# Altium PCB esp32_wled.PcbDoc
Units mil, origin at the board's own origin, x right, y up, seen from the top; angles counter-clockwise.
Board outline 3543.31 x 1968.5 mil, 2 copper layers (Top Layer, Bottom Layer); 95 components, 71 nets, 277 pads, 0 vias.
Unrouted connection lines stored in the file: 191.
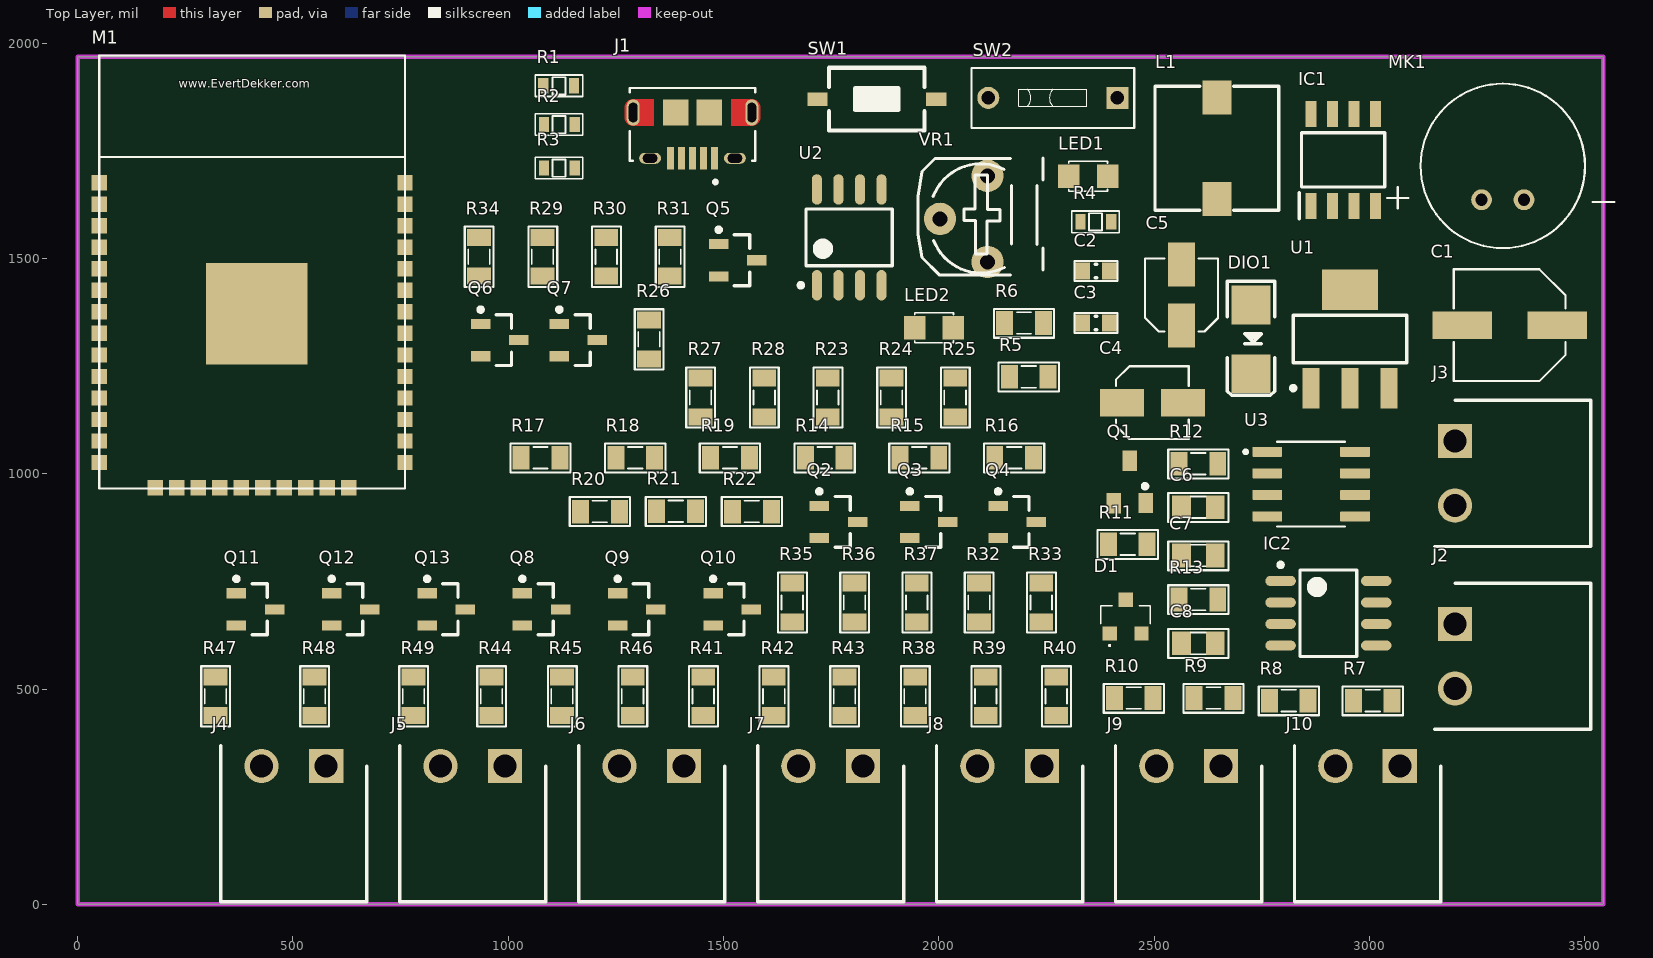
[diagram p0: Top Layer view]
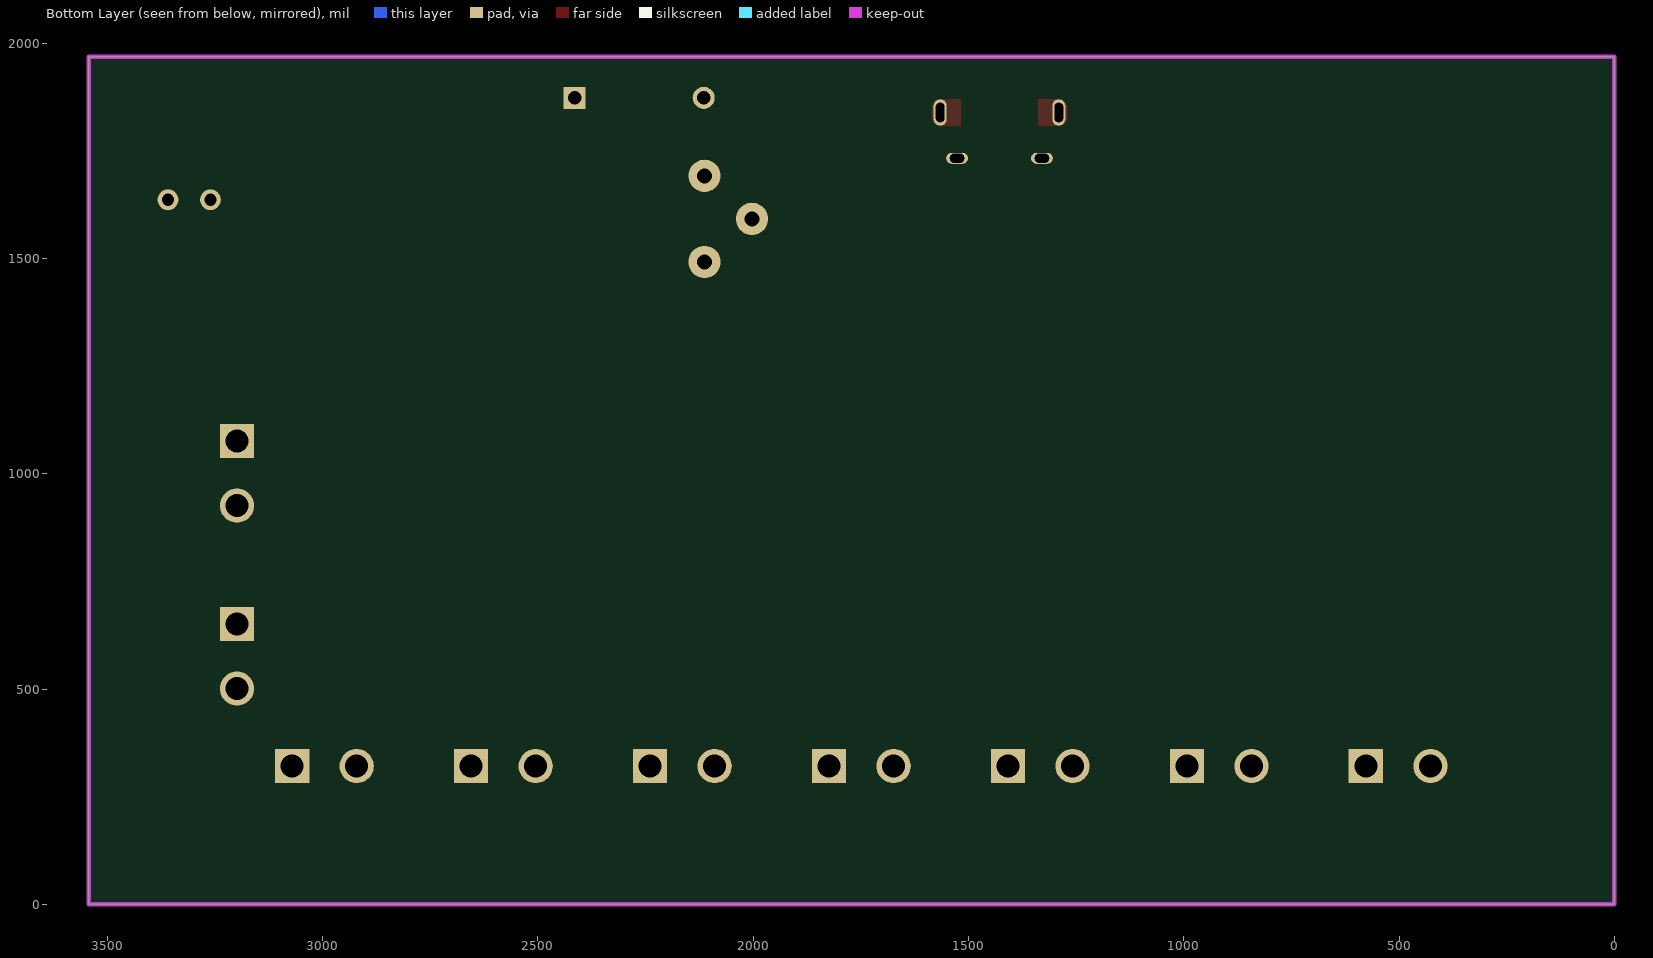
[diagram p1: Bottom Layer view, seen from below]

## Layer stack, top to bottom
Top Solder: solder mask 0.4, Solder Resist, Dk 3.5
Top Layer: signal copper 1.4
Dielectric 1: dielectric 12.6, FR-4, Dk 4.8
Bottom Layer: signal copper 1.4
Bottom Solder: solder mask 0.4, Solder Resist, Dk 3.5

## Board outline
0,0 3543.31,0 3543.31,1968.5 0,1968.5

## Design rules (kind name [scope] priority, off if disabled: settings)
Clearance [All] p1: gap=10
PolygonConnect [All] p1: connectstyle=Relief reliefconductorwidth=10 reliefentries=4 polygonreliefangle="90 Angle" airgapwidth=10
RoomDefinition [5]wled [InComponentClass('[5]wled')] p1: confinementstyle=ConfineIn formatcopy=TRUE lockcomponents=FALSE outline 3970,2890 17700,2890 17700,3390 3970,3390
RoomDefinition [4]Communicate [InComponentClass('[4]Communicate')] p2: confinementstyle=ConfineIn formatcopy=TRUE lockcomponents=FALSE outline 3970,2495 7215,2495 7215,2845 3970,2845
RoomDefinition [3]mic [InComponentClass('[3]mic')] p3: confinementstyle=ConfineIn formatcopy=TRUE lockcomponents=FALSE outline 3970,1795 5765,1795 5765,2445 3970,2445
RoomDefinition [2]Power [InComponentClass('[2]Power')] p4: confinementstyle=ConfineIn formatcopy=TRUE lockcomponents=FALSE outline 3970,1255 6930,1255 6930,1745 3970,1745
RoomDefinition [1]esp32 [InComponentClass('[1]esp32')] p5: confinementstyle=ConfineIn formatcopy=TRUE lockcomponents=FALSE outline 3970,60 6110,60 6110,1205 3970,1205
RoutingVias [All] p1: holewidth=28 width=50 viastyle="Through Hole" minholewidth=28 minwidth=50 maxholewidth=28 maxwidth=50
SolderMaskExpansion [All] p1: expansion=4
Width [All] p1: maxlimit=10 minlimit=10 preferedwidth=10
30 further rules are at their usual default settings.

## Classes and differential pairs
component class [1]esp32: J1 M1 R1 R2 R3 SW1 SW2
component class [2]Power: C1 C2 C3 C4 C5 DIO1 IC1 L1 LED1 R4 U1
component class [3]mic: LED2 MK1 R5 R6 U2 VR1
component class [4]Communicate: C6 C7 C8 D1 IC2 J2 J3 Q1 R7 R8 R9 R10 R11 R12 R13 U3
component class [5]wled: J4 J5 J6 J7 J8 J9 J10 Q2 Q3 Q4 Q5 Q6 Q7 Q8 Q9 Q10 Q11 Q12 Q13 R14 R15 R16 R17 R18 R19 R20 R21 R22 R23 R24 R25 R26 R27 R28 R29 R30 R31 R32 R33 R34 R35 R36 R37 R38 R39 R40 R41 R42 R43 R44 R45 R46 R47 R48 R49

## Components (designator, comment, footprint, x,y, rotation, side; value= is the part's Value field where it differs from the comment)
C1 "470uF" CAP-ALU-SMD-6.3x7.7x2.2 3326,1345 r180 top
C2 "10uF" CN-SMD-0603 2365,1471 r0 top
C3 "10uF" CN-SMD-0603 2365,1350 r0 top
C4 "CN-ALU-SMD" CAP-ALU-SMD-4.5x5x1.4 2496,1165 r0 top
C5 "CN-ALU-SMD" CAP-ALU-SMD-4.5x5x1.4 2564,1415 r90 top
C6 "XXpF" CN-SMD-0805 2603,922 r0 top
C7 "XXpF" CN-SMD-0805 2603,810 r0 top
C8 "XXpF" CN-SMD-0805 2603,606 r0 top
D1 "PSM712-12" PSM71212 2434,668 r0 top
DIO1 "SS34" DIO-SMD-106 2725,1312 r90 top
IC1 "XL1509-5.0E1" SOIC127P600X175-8N#1 2939,1729 r90 top
IC2 "MAX485" SO8 2905,676 r0 top
J1 "10118194-0001LF" AMPHENOL_10118194-0001LF 1428,1839 r180 top
J2 "284513-2" SHDRRA2W80P0X381_1X2_863X920X730P 3199,651 r270 top
J3 "284513-2" SHDRRA2W80P0X381_1X2_863X920X730P 3199,1076 r270 top
J4 "284513-2" SHDRRA2W80P0X381_1X2_863X920X730P 577,321 r180 top
J5 "284513-2" SHDRRA2W80P0X381_1X2_863X920X730P 992.67,321 r180 top
J6 "284513-2" SHDRRA2W80P0X381_1X2_863X920X730P 1408.33,321 r180 top
J7 "284513-2" SHDRRA2W80P0X381_1X2_863X920X730P 1824,321 r180 top
J8 "284513-2" SHDRRA2W80P0X381_1X2_863X920X730P 2239.67,321 r180 top
J9 "284513-2" SHDRRA2W80P0X381_1X2_863X920X730P 2655.33,321 r180 top
J10 "284513-2" SHDRRA2W80P0X381_1X2_863X920X730P 3071,321 r180 top
L1 "1.0 μH" L-SMD-M-7.3x4.5 2646,1756 r0 top
LED1 "LED" LED-0805-Blue 2391.98,1691 r180 top
LED2 "LED" LED-0805-Green 2034,1339 r180 top
M1 "ESP32S_Module" ESP32S 50,966 r0 top
MK1 "AOM-6738P-R" MIC_AOM-6738P-R 3310,1715 r180 top
Q1 "C1815" SOT23B 2444,981 r0 top
Q2 "AO3400" SOT-23_N 1767,888 r0 top
Q3 "AO3400" SOT-23_N 1977,888 r0 top
Q4 "AO3400" SOT-23_N 2182,888 r0 top
Q5 "AO3400" SOT-23_N 1533,1495.79 r0 top
Q6 "AO3400" SOT-23_N 980,1310.37 r0 top
Q7 "AO3400" SOT-23_N 1163,1310.37 r0 top
Q8 "AO3400" SOT-23_N 1077.2,685 r0 top
Q9 "AO3400" SOT-23_N 1298.6,685 r0 top
Q10 "AO3400" SOT-23_N 1520,685 r0 top
Q11 "AO3400" SOT-23_N 413,685 r0 top
Q12 "AO3400" SOT-23_N 634.4,685 r0 top
Q13 "AO3400" SOT-23_N 855.8,685 r0 top
R1 "10K" RES-SMD-0603 1117.99,1901 r180 top
R2 "10K" RES-SMD-0603 1118,1811 r0 top
R3 "0R" RES-SMD-0603 1118,1710 r0 top
R4 "1K" RES-SMD-0603 2364.02,1585 r0 top
R5 "10K" RES-SMD-0805 2209,1225 r0 top
R6 "1K" RES-SMD-0805 2198,1350 r0 top
R7 "10K" RES-SMD-0805 3008,473 r0 top
R8 "10K" RES-SMD-0805 2813,473 r0 top
R9 "120R" RES-SMD-0805 2638,479 r0 top
R10 "10K" RES-SMD-0805 2453,479 r0 top
R11 "10K" RES-SMD-0805 2439,836 r0 top
R12 "60R" RES-SMD-0805 2603,1023 r0 top
R13 "60R" RES-SMD-0805 2603,708 r0 top
R14 "0R" RES-SMD-0805 1735,1037 r0 top
R15 "0R" RES-SMD-0805 1955,1037 r0 top
R16 "0R" RES-SMD-0805 2175,1037 r0 top
R17 "10K" RES-SMD-0805 1075,1037 r0 top
R18 "10K" RES-SMD-0805 1295,1037 r0 top
R19 "10K" RES-SMD-0805 1515,1037 r0 top
R20 "10K" RES-SMD-0805 1213,912 r180 top
R21 "10K" RES-SMD-0805 1389.5,913 r0 top
R22 "10K" RES-SMD-0805 1566,912 r180 top
R23 "0R" RES-SMD-0805 1742.33,1177 r90 top
R24 "0R" RES-SMD-0805 1890.17,1177 r90 top
R25 "0R" RES-SMD-0805 2038,1177 r90 top
R26 "10K" RES-SMD-0805 1327,1312 r90 top
R27 "10K" RES-SMD-0805 1446.67,1177 r90 top
R28 "10K" RES-SMD-0805 1594.5,1177 r90 top
R29 "10K" RES-SMD-0805 1079.83,1504 r90 top
R30 "10K" RES-SMD-0805 1227.67,1504 r90 top
R31 "10K" RES-SMD-0805 1375.5,1504 r90 top
R32 "0R" RES-SMD-0805 2093.39,701 r90 top
R33 "0R" RES-SMD-0805 2238,701 r90 top
R34 "0R" RES-SMD-0805 932,1504 r90 top
R35 "10K" RES-SMD-0805 1659.58,701 r90 top
R36 "10K" RES-SMD-0805 1804.18,701 r90 top
R37 "10K" RES-SMD-0805 1948.79,701 r90 top
R38 "10K" RES-SMD-0805 1945,483 r90 top
R39 "10K" RES-SMD-0805 2109,483 r90 top
R40 "10K" RES-SMD-0805 2273,483 r90 top
R41 "0R" RES-SMD-0805 1453,483 r90 top
R42 "0R" RES-SMD-0805 1617,483 r90 top
R43 "0R" RES-SMD-0805 1781,483 r90 top
R44 "10K" RES-SMD-0805 961,483 r90 top
R45 "10K" RES-SMD-0805 1125,483 r90 top
R46 "10K" RES-SMD-0805 1289,483 r90 top
R47 "10K" RES-SMD-0805 320,483 r90 top
R48 "10K" RES-SMD-0805 550,483 r90 top
R49 "10K" RES-SMD-0805 780,483 r90 top
SW1 "Reset" SW1-SMD 1856,1870 r180 top
SW2 "Flash" SW-DIP1-1 2265,1873 r90 top
U1 "LM1117-3.3V" SOT223 2955,1313 r0 top
U2 "LM393-SPLIT" SO8 1792,1549 r90 top
U3 "TJA1040" SOIC127P600X175-8N#2 2865,976 r0 top
VR1 "10K" VR 2113,1492 r90 top

## Footprints (in the part's own frame and the unit in brackets; to place one, negate y for a bottom-side part, rotate by r counter-clockwise, add the part's x,y. Pads: shape width x height; smd on the part's side, far side on the other; paste and mask are expansions set on the pad)
AMPHENOL_10118194-0001LF [mm]
  rect 0.4x1.35 smd: 1(-1.3,2.7) 2(-0.65,2.7) 3(0,2.7) 4(0.65,2.7) 5(1.3,2.7)
  oval 1.3x0.65 hole 0.55 slot 0.85 at 0 deg: S1(-2.5,2.7) S2(2.5,2.7)
  oval 0.775x1.55 hole 0.5 slot 1.15 at 90 deg: S3(-3.5,0) S6(3.5,0)
  rect 1.5x1.55 smd: S4(-1,0) S5(1,0)
  Top Layer region: 193 vertices and 0 holes, not listed, extent -4,-0.775 -2.3,0.78
  Top Layer region: 193 vertices and 0 holes, not listed, extent 2.3,-0.78 4,0.775
  silkscreen extent -3.7,-1.45 3.7,4.2
CAP-ALU-SMD-4.5x5x1.4 [mm]
  rect 2.6x1.6 smd: 1(-1.8,0) 2(1.8,0)
  silkscreen extent -2.15,-2.15 2.15,2.15, body extent -2.5,-2.15 2.5,2.15, height 5.45
CAP-ALU-SMD-6.3x7.7x2.2 [mm]
  rect 3.5x1.6 smd: 1(-2.8,0) 2(2.8,0)
  silkscreen extent -3.3,-3.3 3.3,3.3, body extent -3.65,-3.3 3.65,3.3, height 7.65
CN-SMD-0603 [mm]
  rect 0.9x1 smd: 1(-0.8,0) 2(0.8,0)
  silkscreen extent -1.27,-0.58 1.27,0.58, body extent -0.8,-0.4 0.8,0.4, height 0.3
CN-SMD-0805 [mil]
  rect 43.31x55 smd: 1(-39.36,0.01) 2(39.37,0.01)
  silkscreen extent -70,-34 70,33, body extent -39,-25 39,25, height 31
DIO-SMD-106 [mil]
  rect 90x90.55 smd: 1(80,0) 2(-80,0)
  silkscreen extent -130,-55 135,55, body extent -99,-50 106,52, height 95
ESP32S [mm] "ESP32S-Module"
  rect 0.9x0.9 smd: 1(0,18.034) 2(0,16.764) 3(0,15.494) 4(0,14.224) 5(0,12.954) 6(0,11.684) 7(0,10.414) 8(0,9.144) 9(0,7.874) 10(0,6.604) 11(0,5.334) 12(0,4.064) 13(0,2.794) 14(0,1.524) 15(3.3,0.034) 16(4.57,0.034) 17(5.84,0.034) 18(7.11,0.034) 19(8.38,0.034) 20(9.65,0.034) 21(10.92,0.034) 22(12.19,0.034) 23(13.46,0.034) 24(14.73,0.034) 25(18.034,1.524) 26(18.034,2.794) 27(18.034,4.064) 28(18.034,5.334) 29(18.034,6.604) 30(18.034,7.874) 31(18.034,9.144) 32(18.034,10.414) 33(18.034,11.684) 34(18.034,12.954) 35(18.034,14.224) 36(18.034,15.494) 37(18.034,16.764) 38(18.034,18.034)
  rect 6x6 smd: 101(9.3,10.3)
  silkscreen extent 0,0 18.03,25.53, body extent 0,0 18.03,25.53, height 2
L-SMD-M-7.3x4.5 [mm] "WE-PDA SMD Shielded Power Inductor, 7345"
  rect 1.7x2 smd: 1(0,3) 2(0,-3)
  silkscreen extent -3.65,-3.65 3.65,3.65, body extent -3.65,-3.65 3.65,3.65, height 4.05
LED-0805-Blue [mil]
  rect 50x55 smd: 1(0,0) 2(90,0)
  silkscreen extent 0,-35 90,35, body extent 5,-25 85,25, height 43
LED-0805-Green [mil]
  rect 50x55 smd: 1(0,0) 2(90,0)
  silkscreen extent 0,-35 90,35, body extent 5,-25 85,25, height 43
MIC_AOM-6738P-R [mm]
  round 1.228 hole 0.72: N(-1.25,2) P(1.25,2)
  silkscreen extent -6.58,-4.85 6.83,4.85, body extent -4.85,-4.85 4.85,4.85, height 7.01
PSM71212 [mm]
  rect 0.84x0.84 smd: 1(-0.94,-1) 2(0.94,-1) 3(0,1)
  silkscreen extent -1.46,-1.75 1.46,0.65, body extent -1.46,-1.34 1.46,1.34, height 1.31
RES-SMD-0603 [mm]
  rect 0.6x0.9 smd: 1(-0.889,0) 2(0.927,0)
  silkscreen extent -1.4,-0.64 1.4,0.64, body extent -0.8,-0.4 0.8,0.4, height 0.43
RES-SMD-0805 [mil]
  rect 39.37x55 smd: 1(-45,0) 2(45,0)
  silkscreen extent -70,-34 70,33, body extent -39,-25 39,25, height 31
SHDRRA2W80P0X381_1X2_863X920X730P [mm]
  rect 2.025x2.025 hole 1.35: 1(0,0)
  round 2.025 hole 1.35: 2(3.81,0)
  silkscreen extent -2.41,-1.2 6.22,8, body extent -3.05,-1.2 6.86,8, height 7.3
SO8 [mm] "SOIC, 8-Leads, Body 4.9x3.9mm, Pitch 1.27mm, IPC High Density"
  oval 1.8x0.6 smd: 1(-2.825,1.905) 2(-2.825,0.635) 3(-2.825,-0.635) 4(-2.825,-1.905) 5(2.825,-1.905) 6(2.825,-0.635) 7(2.825,0.635) 8(2.825,1.905)
  silkscreen extent -2.95,-2.55 1.68,2.98, body extent -2.99,-2.45 3,2.45, height 1.6
SOIC127P600X175-8N#1 [mm]
  rect 1.525x0.65 smd: 1(-2.712,1.905) 2(-2.712,0.635) 3(-2.712,-0.635) 4(-2.712,-1.905) 5(2.712,-1.905) 6(2.712,-0.635) 7(2.712,0.635) 8(2.712,1.905)
  silkscreen extent -3.47,-2.45 1.6,2.58, body extent -3,-2.45 3,2.45, height 1.75
SOIC127P600X175-8N#2 [mm]
  rrect15% 1.75x0.59 smd: 1(-2.585,1.905) 2(-2.585,0.635) 3(-2.585,-0.635) 4(-2.585,-1.905) 5(2.585,-1.905) 6(2.585,-0.635) 7(2.585,0.635) 8(2.585,1.905)
  silkscreen extent -3.97,-2.5 2,2.5
SOT23B [mm] "SOT 23B"
  rect 0.85x1.2 smd: 1(0.94,-1.245) 2(0,1.25) 3(-0.95,-1.25)
  silkscreen extent 0.77,-0.38 1.02,-0.13, body extent -1.5,-1.3 1.5,1.2, height 1.06
SOT223 [mm]
  rect 1x2.4 smd: 1(-2.3,-2.9) 2(0,-2.9) 3(2.3,-2.9)
  rect 3.3x2.4 smd: 4(0,2.9)
  silkscreen extent -3.47,-3.02 3.35,1.4, body extent -3.25,-3.56 3.25,3.4, height 1.68
SOT-23_N [mm] "SOT23, 3-Leads, Body 2.9x1.3mm, Pitch 0.95mm, Lead Span 2.3mm, IPC Medium Density"
  rect 1.15x0.6 smd: 1(-1.125,0.95) 2(-1.125,-0.95) 3(1.125,0)
  silkscreen extent -1.25,-1.5 0.7,1.92, body extent -0.7,-1.5 0.7,1.5, height 1.11
SW1-SMD [mm]
  rect 1.2x0.8 smd: 1(-3.5,0) 2(3.5,0)
  silkscreen extent -2.82,-1.85 2.82,1.85, body extent -3.05,-1.85 3.05,1.85, height 2.5
SW-DIP1-1 [mm] "01p, 2.54mm Pitch, Horizontal, Box Type, THT, flat Actuator, red, without Tape, Tube"
  rect 1.3x1.3 hole 0.8: 1(0,-3.81)
  round 1.3 hole 0.8: 2(0,3.81)
  silkscreen extent -1.77,-4.8 1.77,4.8, body extent -1.77,-4.8 1.77,4.8, height 5.4
VR [mil] "Resistor Variable"
  round 75 hole 35: 1(0,0) 2(100,110) 3(200,0)
  silkscreen extent -30,-129 241,161, body extent -30,-135 230,140, height 177

## Part data
C1: library part CN-ALU-SMD, "Polarized Capacitor (Axial)"
C2 C3: library part CN, "Tu gom"
C4 C5: "Polarized Capacitor (Axial)"
C6 C7 C8: library part CN
D1: "TVS Diode (Bi-directional)"
DIO1: library part "Diode SMD", "Default Diode"
IC1: "Integrated Circuit"
IC2: "RS232 - RS485 (Same sn75176)"
J1: "USB - micro B USB 2.0 Receptacle Connector 5 Position Surface Mount, Right Angle; Through Hole"
J2 J3 J4 J5 J6 J7 J8 J9 J10: "Connector"
L1: library part L-SMD-1
LED1 LED2: library part "LED SMD"
M1: "Esp-32S"
MK1: "MICROPHONE -38DB1.5VDC .5MA 2.2KOHM"
Q1: "NPN 600mW, ECB"
Q2 Q3 Q4 Q5 Q6 Q7 Q8 Q9 Q10 Q11 Q12 Q13: library part IRLML2402, "HEXFET Power MOSFET"
R1 R2 R3 R4 R5 R6 R7 R8 R9 R10 R11 R12 R13 R14 R15 R16 R17 R18 R19 R20 R21 R22 R23 R24 R25 R26 R27 R28 R29 R30 R31 R32 R33 R34 R35 R36 R37 R38 R39 R40 R41 R42 R43 R44 R45 R46 R47 R48 R49: library part Res-SMD, "Resistor"
SW1 SW2: library part SW2, "Switch button 2 pin"
U1: library part LM1117, "800mA Low-Dropout Linear Regulator"
U2: "IC DUAL COMPARATOR"
U3: "1/1 Transceiver Half CANbus 8-SO"
VR1: library part VR, "Var Resistor"

## Nets (pads, with @x,y where several pads share a name; then routed paths per layer and width w, separated by ;. In a path a pad name is that pad's centre, name@x,y a point inside that pad or via, vN(x,y) a via of type N, cw(c..) or ccw(c..) an arc to the next point about the centre after c; other vN are vias at no path point)
3V3: C3.1 C5.1 IC2.8 LED1.1 M1.2 Q2.1 Q3.1 Q4.1 Q5.1 Q6.1 Q7.1 Q8.1 Q9.1 Q10.1 Q11.1 Q12.1 Q13.1 R1.1 R2.2 R5.1 R7.2 R8.2 R20.1 R21.1 R22.1 R29.1 R30.1 R31.1 R38.1 R39.1 R40.1 R47.1 R48.1 R49.1 U1.2 U2.8 VR1.1
5V: C2.1 C4.1 IC1.3 J1.1 L1.1 R17.1 R18.1 R19.1 R26.1 R27.1 R28.1 R35.1 R36.1 R37.1 R44.1 R45.1 R46.1 U1.3 U3.3
12V: C1.1 IC1.1 J4.1 R14.1 R15.1 R16.1 R23.1 R24.1 R25.1 R32.1 R33.1 R34.1 R41.1 R42.1 R43.1
BTN_M1: M1.26
BTN_M2: M1.29
BTN_M3: M1.6
BTN_M4: M1.23
BTN_M5: M1.7
BTN_M6: M1.8
BTN_M7: M1.9
BTN_M8: M1.11
BTN_M9: M1.25 R1.2 SW2.2
CANH: C8.2 J3.2 R13.2 U3.7
CANL: C6.2 J3.1 R12.1 U3.6
DS: M1.31
DS_2: M1.27
ESP_LED_1: Q2.2 R20.2
ESP_LED_2: Q3.2 R21.2
ESP_LED_3: Q4.2 R22.2
ESP_LED_4: Q5.2 R29.2
ESP_LED_5: Q6.2 R30.2
ESP_LED_6: Q7.2 R31.2
ESP_LED_7: Q8.2 R38.2
ESP_LED_8: Q9.2 R39.2
ESP_LED_9: Q10.2 R40.2
ESP_LED_10: Q11.2 R47.2
ESP_LED_11: Q12.2 R48.2
ESP_LED_12: Q13.2 R49.2
GND: C1.2 C2.2 C3.2 C4.2 C5.2 C6.1 C7.1 C8.1 D1.3 DIO1.1 IC1.5 IC1.6 IC1.7 IC1.8 IC2.5 J1.5 J1.S1 J1.S2 J1.S3 J1.S4 J1.S5 J1.S6 J4.2 LED2.2 M1.1 M1.15 M1.38 M1.101 MK1.N Q1.1 R4.2 R11.1 SW1.2 SW2.1 U1.1 U2.4 U3.2 U3.8 VR1.3
IN_LED_1_1: M1.14
IN_LED_2_1: M1.12
LED_1: J5.1 Q2.3 R14.2 R17.2
LED_2: J5.2 Q3.3 R15.2 R18.2
LED_3: J6.1 Q4.3 R16.2 R19.2
LED_4: J6.2 Q5.3 R23.2 R26.2
LED_5: J7.1 Q6.3 R24.2 R27.2
LED_6: J7.2 Q7.3 R25.2 R28.2
LED_7: J8.1 Q8.3 R32.2 R35.2
LED_8: J8.2 Q9.3 R33.2 R36.2
LED_9: J9.1 Q10.3 R34.2 R37.2
LED_10: J9.2 Q11.3 R41.2 R44.2
LED_11: J10.1 Q12.3 R42.2 R45.2
LED_12: J10.2 Q13.3 R43.2 R46.2
MODE_RUN_1: M1.10
MODE_SETUP: M1.37
NetC7_2: C7.2 R12.2 R13.1
NetDIO1_2: DIO1.2 IC1.2 L1.2
NetIC2_2: IC2.2 IC2.3 Q1.2 R8.1
NETLABEL1: MK1.P R5.2 U2.2
NETLABEL2: R6.1 U2.1
NetLED1_2: LED1.2 R4.1
NetLED2_1: LED2.1 R6.2
NetM1_3: M1.3 R2.1 SW1.1
NetM1_24: M1.24 R3.2
NetQ1_3: Q1.3 R10.2
NetU2_3: U2.3 VR1.2
PIN_VOL: M1.5 R3.1
RS485_A: D1.2 IC2.6 J2.2 R9.1 R11.2
RS485_B: D1.1 IC2.7 J2.1 R7.1 R9.2
RX_1: J1.2 M1.35
RXCAN: U3.4
RXD2: IC2.1
SCL: M1.36
SDA: M1.33
SH_CP: M1.30
SH_CP_2: M1.13
ST_CP: M1.28
ST_CP_2: M1.16
TX_1: J1.3 M1.34
TXCAN: U3.1
TXD2: IC2.4 R10.1
pads on no net: IC1.4 J1.4 M1.4 M1.17 M1.18 M1.19 M1.20 M1.21 M1.22 M1.32 U1.4 U2.5 U2.6 U2.7 U3.5

## Keep-outs
Keep-Out Layer:
  the board outline again, w10

## Text inside footprints (layer, text, board x,y; h text height)
J1: Mechanical 13 "PCB END" at 1504.77,1921.68 h19.68 r180
M1: Top Overlay "www.EvertDekker.com" at 235,1896 h19.68